# Altium PCB UVB LED Controller.PcbDoc
Units mm, origin at the board's own origin, x right, y up, seen from the top; angles counter-clockwise.
Board outline 80 x 155 mm, 2 copper layers (Top Layer, Bottom Layer), stack 1.569 mm thick; 142 components, 109 nets, 588 pads, 284 vias.
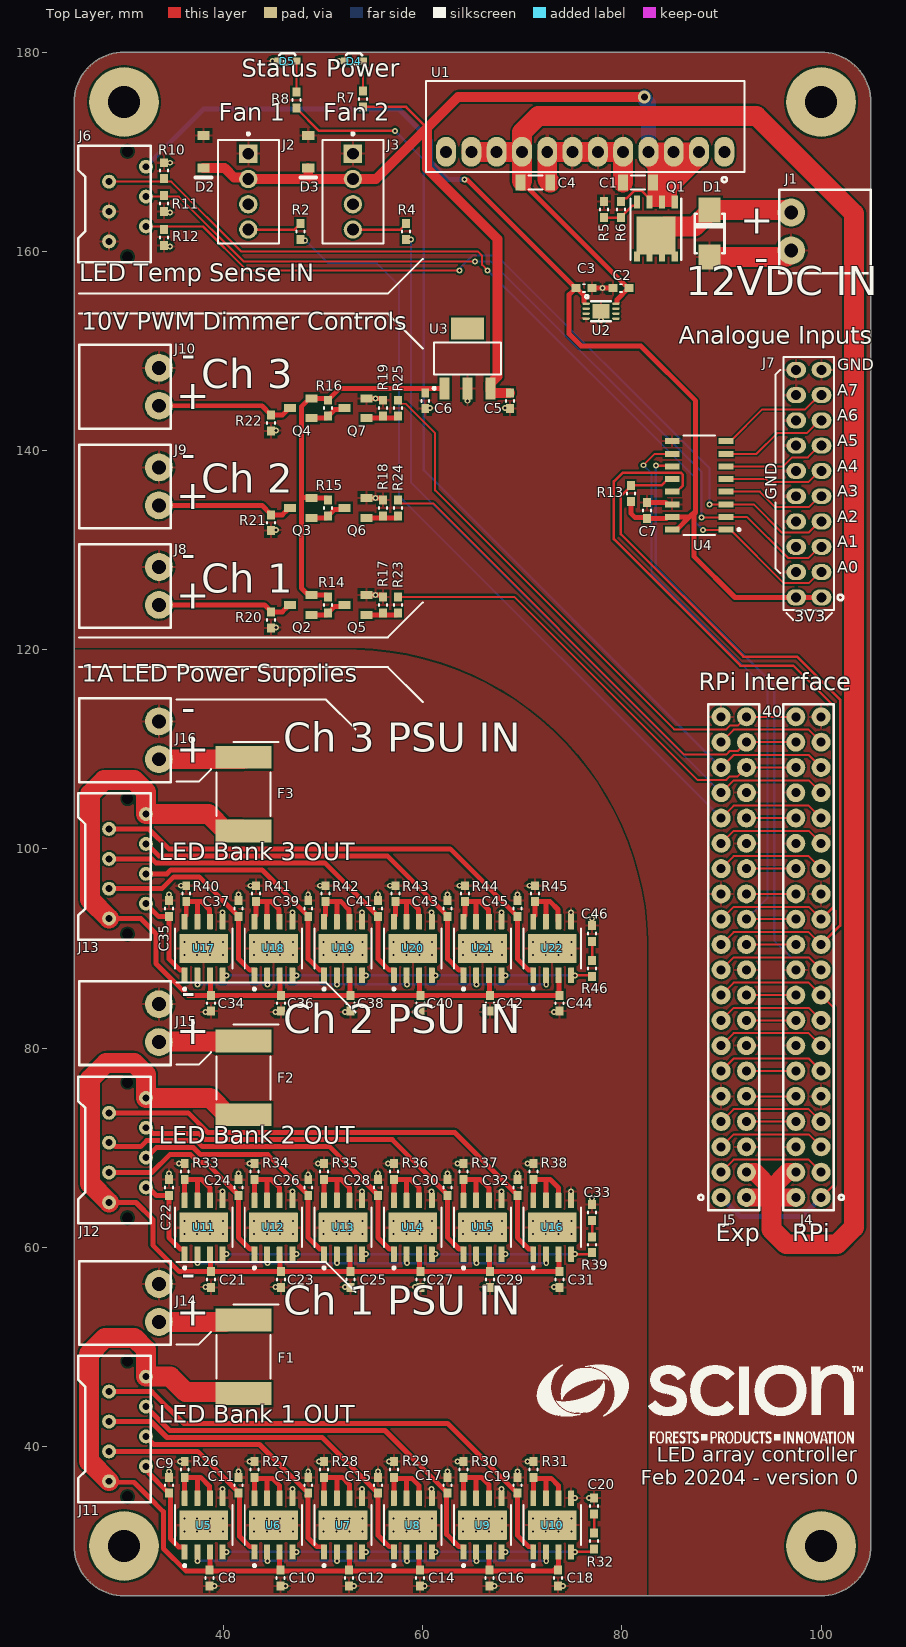
[diagram p0: Top Layer view]
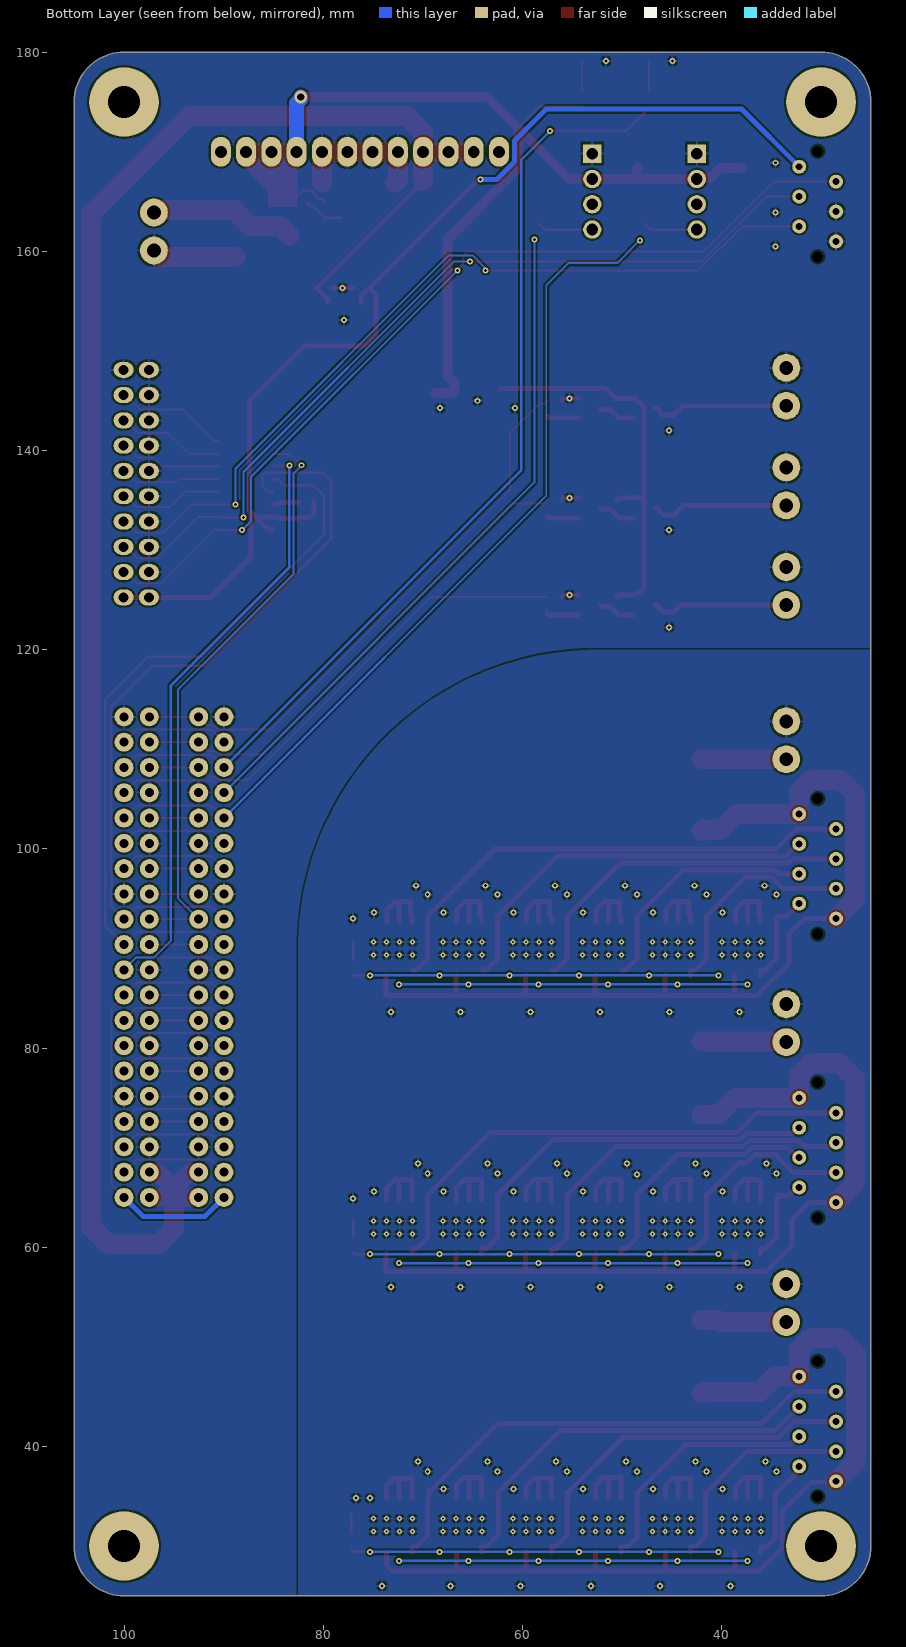
[diagram p1: Bottom Layer view, seen from below]
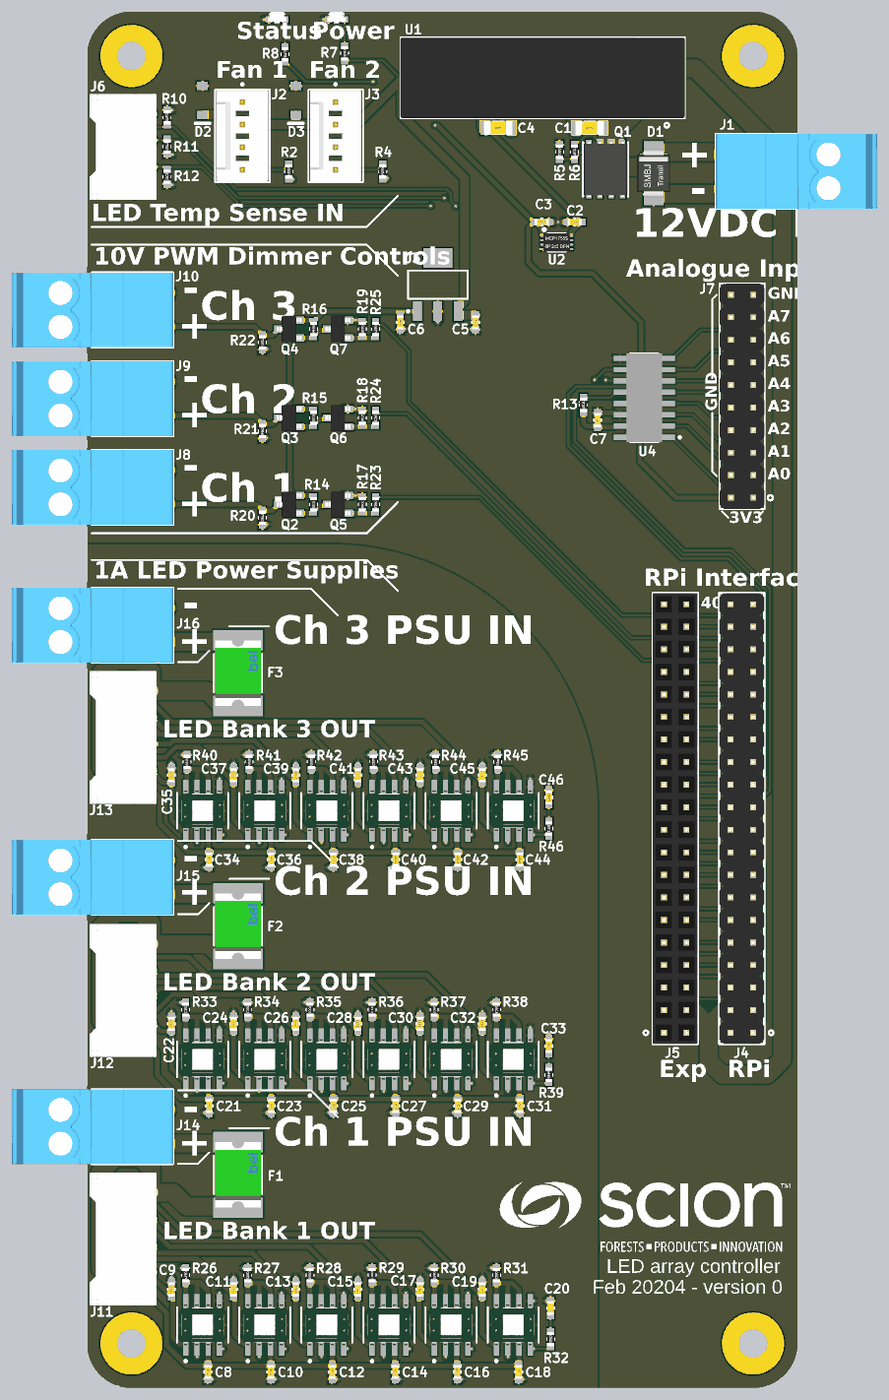
[diagram p2: 3D render of the assembled board from above, using the file's embedded part models]

## Layer stack, top to bottom
Top Solder: solder mask 0.0254, SM-001, Dk 4
Top Layer: signal copper 0.035
Dielectric 1: core 1.4986, Core-043, Dk 4.3
Bottom Layer: signal copper 0.035
Bottom Solder: solder mask 0.0254, SM-001, Dk 4

## Board outline
25,175 cw(c30,175) 30,180 100,180 cw(c100,175) 105,175 105,30 cw(c100,30) 100,25 30,25 cw(c30,30) 25,30

## Design rules (kind name [scope] priority, off if disabled: settings)
Clearance Clearance_1 [OnMid vs OnMid] p1: gap=0.2 ignorepadtopadclearanceinfootprint=FALSE sourcerule=38 cellrowname=All cellrowtype=0 cellcolname=All cellcoltype=0 innerlayers=TRUE
Clearance Clearance_2 [(ExistsOnLayer('Top Layer') Or ExistsOnLayer('Bottom Layer')) vs (ExistsOnLayer('Top Layer') Or ExistsOnLayer('Bottom Layer'))] p2: gap=0.2 ignorepadtopadclearanceinfootprint=FALSE sourcerule=38 cellrowname=All cellrowtype=0 cellcolname=All cellcoltype=0 outerlayers=TRUE
Clearance [All] p3: gap=0.254 ignorepadtopadclearanceinfootprint=FALSE ismatrix=TRUE
PolygonConnect [All] p1: connectstyle=Relief reliefconductorwidth=0.254 reliefentries=4 polygonreliefangle="90 Angle" airgapwidth=0.254
RoutingVias RoutingViaStyle_1 [All] p1: holewidth=0.3 width=0.6 viastyle="Through Hole" minholewidth=0.15 minwidth=0.4 maxholewidth=3 maxwidth=5
RoutingVias [All] p2: holewidth=0.711 width=1.27 viastyle="Through Hole" minholewidth=0.711 minwidth=1.27 maxholewidth=0.711 maxwidth=1.27
SolderMaskExpansion [All] p1: expansion=0.102 istentingtop=FALSE
Width MaxMinWidth_1 [All] p1: maxlimit=10 minlimit=0.2 preferedwidth=0.25 minimp=50.000000 maximp=50.000000 favimp=50.000000
Width [All] p2: maxlimit=0.254 minlimit=0.254 preferedwidth=0.254
30 further rules are at their usual default settings.

## Classes and differential pairs
component class "UVB LED Controller": C1 C2 C3 C4 C5 C6 C7 D1 D2 D3 D4 D5 J1 J2 J3 J4 J5 J6 J7 J8 J9 J10 Q1 Q2 Q3 Q4 Q5 Q6 Q7 R2 R4 R5 R6 R7 R8 R10 R11 R12 R13 R14 R15 R16 R17 R18 R19 R20 R21 R22 R23 R24 R25 U1 U2 U3 U4
component class "UVB LED Controller - current balancing": C8 C9 C10 C11 C12 C13 C14 C15 C16 C17 C18 C19 C20 C21 C22 C23 C24 C25 C26 C27 C28 C29 C30 C31 C32 C33 C34 C35 C36 C37 C38 C39 C40 C41 C42 C43 C44 C45 C46 F1 F2 F3 J11 J12 J13 J14 J15 J16 R26 R27 R28 R29 R30 R31 R32 R33 R34 R35 R36 R37 R38 R39 R40 R41 R42 R43 R44 R45 R46 U5 U6 U7 U8 U9 U10 U11 U12 U13 U14 U15 U16 U17 U18 U19 U20 U21 U22

## Components (designator, comment, footprint, x,y, rotation, side; value= is the part's Value field where it differs from the comment)
C1 "Capacitor" 1206_CAP 81.6,166.9 r180 top value=22µF
C2 "Capacitor" 0603_CAP 79.9,156.3 r180 top value=10µF
C3 "Capacitor" 0603_CAP 76.2,156.3 r0 top value=10µF
C4 "Capacitor" 1206_CAP 71.3,166.9 r180 top value=22µF
C5 "Capacitor" 0603_CAP 68.75,145 r270 top value=1µF
C6 "Capacitor" 0603_CAP 60.25,145 r270 top value=1µF
C7 "Capacitor" 0603_CAP 82.5,134 r90 top value=1µF
C8 "Capacitor" 0603_CAP 38.6,26.8 r270 top value=100nF
C9 "Capacitor" 0603_CAP 34.5,36.1 r90 top value=1µF
C10 "Capacitor" 0603_CAP 45.7,26.8 r270 top value=100nF
C11 "Capacitor" 0603_CAP 41.5,36.1 r90 top value=1µF
C12 "Capacitor" 0603_CAP 52.6,26.8 r270 top value=100nF
C13 "Capacitor" 0603_CAP 48.5,36.1 r90 top value=1µF
C14 "Capacitor" 0603_CAP 59.7,26.8 r270 top value=100nF
C15 "Capacitor" 0603_CAP 55.5,36.1 r90 top value=1µF
C16 "Capacitor" 0603_CAP 66.7,26.8 r270 top value=100nF
C17 "Capacitor" 0603_CAP 62.5,36.1 r90 top value=1µF
C18 "Capacitor" 0603_CAP 73.6,26.8 r270 top value=100nF
C19 "Capacitor" 0603_CAP 69.5,36.1 r90 top value=1µF
C20 "Capacitor" 0603_CAP 77.2,34 r270 top value=1µF
C21 "Capacitor" 0603_CAP 38.75,56.75 r270 top value=100nF
C22 "Capacitor" 0603_CAP 34.5,66 r90 top value=1µF
C23 "Capacitor" 0603_CAP 45.75,56.75 r270 top value=100nF
C24 "Capacitor" 0603_CAP 41.5,66 r90 top value=1µF
C25 "Capacitor" 0603_CAP 52.75,56.75 r270 top value=100nF
C26 "Capacitor" 0603_CAP 48.5,66 r90 top value=1µF
C27 "Capacitor" 0603_CAP 59.75,56.75 r270 top value=100nF
C28 "Capacitor" 0603_CAP 55.5,66 r90 top value=1µF
C29 "Capacitor" 0603_CAP 66.75,56.75 r270 top value=100nF
C30 "Capacitor" 0603_CAP 62.5,66 r90 top value=1µF
C31 "Capacitor" 0603_CAP 73.75,56.75 r270 top value=100nF
C32 "Capacitor" 0603_CAP 69.5,66 r90 top value=1µF
C33 "Capacitor" 0603_CAP 77,63.5 r270 top value=1µF
C34 "Capacitor" 0603_CAP 38.75,84.5 r270 top value=100nF
C35 "Capacitor" 0603_CAP 34.5,94 r90 top value=1µF
C36 "Capacitor" 0603_CAP 45.75,84.5 r270 top value=100nF
C37 "Capacitor" 0603_CAP 41.5,94 r90 top value=1µF
C38 "Capacitor" 0603_CAP 52.75,84.5 r270 top value=100nF
C39 "Capacitor" 0603_CAP 48.5,94 r90 top value=1µF
C40 "Capacitor" 0603_CAP 59.75,84.5 r270 top value=100nF
C41 "Capacitor" 0603_CAP 55.5,94 r90 top value=1µF
C42 "Capacitor" 0603_CAP 66.75,84.5 r270 top value=100nF
C43 "Capacitor" 0603_CAP 62.5,94 r90 top value=1µF
C44 "Capacitor" 0603_CAP 73.75,84.5 r270 top value=100nF
C45 "Capacitor" 0603_CAP 69.5,94 r90 top value=1µF
C46 "Capacitor" 0603_CAP 77,91.5 r270 top value=1µF
D1 "Transil" SMBJ 88.8,161.8 r90 top
D2 "Diode" SOD-123 38,170 r270 top
D3 "Diode" SOD-123 48.5,170 r270 top
D4 "LED" KPA-2106S_LED 53.1,179.1 r0 top
D5 "LED" KPA-2106S_LED 46.4,179.1 r0 top
F1 "0ZCF0100AF2A" FP-0ZCF0100AF2A-MFG 42,49 r90 top
F2 "0ZCF0100AF2A" FP-0ZCF0100AF2A-MFG 42,77 r90 top
F3 "0ZCF0100AF2A" FP-0ZCF0100AF2A-MFG 42,105.5 r90 top
J1 "2_Pin" "2P 3.81mm Header Plugable" 97,162 r270 top
J2 "22-29-2041" FP-22-29-2041-MFG 42.5,166 r90 top
J3 "22-29-2041" FP-22-29-2041-MFG 53,166 r90 top
J4 "40_Pin RPi Header" 40_Pin_0.1in_male_header 100,65 r180 top
J5 "40_Pin RPi Header" 40_Pin_0.1in_female_header 92.5,65 r180 top
J6 "Thermistors" "6P RA MOLEX Clik-MATE 1.5mm" 32.2,168.5 r270 top
J7 "20_Pin" "20P 2.54mm DIP header" 100.04,125.25 r180 top
J8 "LED dim 1" "2P 3.81mm Header Plugable" 33.5,126.405 r90 top
J9 "LED dim 2" "2P 3.81mm Header Plugable" 33.5,136.405 r90 top
J10 "LED dim 3" "2P 3.81mm Header Plugable" 33.5,146.405 r90 top
J11 "LED bank 1" "8P RA MOLEX Clik-MATE 1.5mm" 32.2,47 r270 top
J12 "LED bank 1" "8P RA MOLEX Clik-MATE 1.5mm" 32.2,75 r270 top
J13 "LED bank 1" "8P RA MOLEX Clik-MATE 1.5mm" 32.2,103.5 r270 top
J14 "LED supply 1" "2P 3.81mm Header Plugable" 33.5,54.405 r90 top
J15 "LED supply 2" "2P 3.81mm Header Plugable" 33.5,82.5 r90 top
J16 "LED supply 3" "2P 3.81mm Header Plugable" 33.5,110.905 r90 top
Q1 "PMOS" "PowerDI 5060-8" 83.4,162.222 r180 top
Q2 "PMOS" SOT-23-PMOS 47.75,124.5 r90 top
Q3 "PMOS" SOT-23-PMOS 47.75,134.25 r90 top
Q4 "PMOS" SOT-23-PMOS 47.75,144.25 r90 top
Q5 "NMOS" SOT-23 53.25,124.5 r90 top
Q6 "NMOS" SOT-23 53.25,134.25 r90 top
Q7 "NMOS" SOT-23 53.25,144.25 r90 top
R2 "Resistor" 0603_RES 47.7,162 r270 top value=100R
R4 "Resistor" 0603_RES 58.3,162 r270 top value=100R
R5 "Resistor" 0603_RES 78.2,164.2 r270 top value=10k
R6 "Resistor" 0603_RES 79.9,164.2 r90 top value=10k
R7 "Resistor" 0603_RES 54,175.3 r90 top value=1k
R8 "Resistor" 0603_RES 47.3,175.2 r90 top value=100R
R10 "Resistor" 0603_RES 34,168.1 r270 top value=10k
R11 "Resistor" 0603_RES 34,164.8 r90 top value=10k
R12 "Resistor" 0603_RES 34,161.4 r90 top value=10k
R13 "Resistor" 0603_RES 80.9,135.7 r90 top value=10k
R14 "Resistor" 0603_RES 50.5,124.5 r90 top value=100k
R15 "Resistor" 0603_RES 50.5,134.25 r90 top value=100k
R16 "Resistor" 0603_RES 50.5,144.25 r90 top value=100k
R17 "Resistor" 0603_RES 56,124.5 r90 top value=100k
R18 "Resistor" 0603_RES 56,134.25 r90 top value=100k
R19 "Resistor" 0603_RES 56,144.25 r90 top value=100k
R20 "Resistor" 0603_RES 44.75,123 r90 top value=10k
R21 "Resistor" 0603_RES 44.75,132.75 r90 top value=10k
R22 "Resistor" 0603_RES 44.75,142.75 r90 top value=10k
R23 "Resistor" 0603_RES 57.5,124.5 r270 top value=100R
R24 "Resistor" 0603_RES 57.5,134.25 r270 top value=100R
R25 "Resistor" 0603_RES 57.5,144.25 r270 top value=100R
R26 "Resistor" 0603_RES 36.1,37.7 r270 top value=2R
R27 "Resistor" 0603_RES 43.1,37.7 r270 top value=2R
R28 "Resistor" 0603_RES 50.1,37.7 r270 top value=2R
R29 "Resistor" 0603_RES 57.1,37.7 r270 top value=2R
R30 "Resistor" 0603_RES 64.1,37.7 r270 top value=2R
R31 "Resistor" 0603_RES 71.1,37.7 r270 top value=2R
R32 "Resistor" 0603_RES 77.2,30.5 r270 top value=51R1
R33 "Resistor" 0603_RES 36.1,67.6 r270 top value=2R
R34 "Resistor" 0603_RES 43.1,67.6 r270 top value=2R
R35 "Resistor" 0603_RES 50.1,67.6 r270 top value=2R
R36 "Resistor" 0603_RES 57.1,67.6 r270 top value=2R
R37 "Resistor" 0603_RES 64.1,67.6 r270 top value=2R
R38 "Resistor" 0603_RES 71.1,67.6 r270 top value=2R
R39 "Resistor" 0603_RES 77,60.25 r270 top value=51R1
R40 "Resistor" 0603_RES 36.25,95.5 r270 top value=2R
R41 "Resistor" 0603_RES 43.25,95.5 r270 top value=2R
R42 "Resistor" 0603_RES 50.25,95.5 r270 top value=2R
R43 "Resistor" 0603_RES 57.25,95.5 r270 top value=2R
R44 "Resistor" 0603_RES 64.25,95.5 r270 top value=2R
R45 "Resistor" 0603_RES 71.25,95.5 r270 top value=2R
R46 "Resistor" 0603_RES 77,88 r270 top value=51R1
U1 "K78XX-3AR3" K78XX-3AR3-Footprint 90.28,170 r180 top
U2 "MCP1755S" "8P 2x3 DFN" 77.9,154 r0 top
U3 "MCP1804T-A002I/DB" SOT-223-DB3_N 64.5,149.25 r90 top
U4 "MCP3008T-I/SL" FP-C04-108-MFG 87.75,136.5 r180 top
U5 "LM3466MR/NOPB" FP-DDA0008A-MFG 38,32.1 r90 top
U6 "LM3466MR/NOPB" FP-DDA0008A-MFG 45,32.1 r90 top
U7 "LM3466MR/NOPB" FP-DDA0008A-MFG 52,32.1 r90 top
U8 "LM3466MR/NOPB" FP-DDA0008A-MFG 59,32.1 r90 top
U9 "LM3466MR/NOPB" FP-DDA0008A-MFG 66,32.1 r90 top
U10 "LM3466MR/NOPB" FP-DDA0008A-MFG 73,32.1 r90 top
U11 "LM3466MR/NOPB" FP-DDA0008A-MFG 38,62 r90 top
U12 "LM3466MR/NOPB" FP-DDA0008A-MFG 45,62 r90 top
U13 "LM3466MR/NOPB" FP-DDA0008A-MFG 52,62 r90 top
U14 "LM3466MR/NOPB" FP-DDA0008A-MFG 59,62 r90 top
U15 "LM3466MR/NOPB" FP-DDA0008A-MFG 66,62 r90 top
U16 "LM3466MR/NOPB" FP-DDA0008A-MFG 73,62 r90 top
U17 "LM3466MR/NOPB" FP-DDA0008A-MFG 38,90 r90 top
U18 "LM3466MR/NOPB" FP-DDA0008A-MFG 45,90 r90 top
U19 "LM3466MR/NOPB" FP-DDA0008A-MFG 52,90 r90 top
U20 "LM3466MR/NOPB" FP-DDA0008A-MFG 59,90 r90 top
U21 "LM3466MR/NOPB" FP-DDA0008A-MFG 66,90 r90 top
U22 "LM3466MR/NOPB" FP-DDA0008A-MFG 73,90 r90 top

## Footprints (in the part's own frame and the unit in brackets; to place one, negate y for a bottom-side part, rotate by r counter-clockwise, add the part's x,y. Pads: shape width x height; smd on the part's side, far side on the other; paste and mask are expansions set on the pad)
"2P 3.81mm Header Plugable" [mm]
  round 2.8 hole 1.4 mask+0.05: 1(-1.905,0) 2(1.905,0)
  silkscreen extent -4.2,-1.2 4.2,8, body extent -4.21,-1.2 4.21,17, height 7.71
"6P RA MOLEX Clik-MATE 1.5mm" [mm] "5031750600"
  round 1.4 hole 0.7: 1(0,0) 2(1.5,-3.7) 3(3,0) 4(4.5,-3.7) 5(6,0) 6(7.5,-3.7)
  round 0 hole 1.1 unplated: ""(-1.55,-1.85) ""(9.05,-1.85)
  silkscreen extent -2.1,-6.8 9.6,0.5, body extent -2.2,-6.78 9.7,0.47, height 7
"8P 2x3 DFN" [mm]
  oval 0.75x0.25 smd: 1(-1.5,0.75) 2(-1.5,0.25) 3(-1.5,-0.25) 4(-1.5,-0.75) 5(1.5,-0.75) 6(1.5,-0.25) 7(1.5,0.25) 8(1.5,0.75)
  rect 1.75x1.45 smd: 9(0,0)
  silkscreen extent -1.58,-1 1,1.61, body extent -1.5,-1 1.5,1, height 0.91
"8P RA MOLEX Clik-MATE 1.5mm" [mm] "5031750800"
  round 1.4 hole 0.7: 1(0,0) 2(1.5,-3.7) 3(3,0) 4(4.5,-3.7) 5(6,0) 6(7.5,-3.7) 7(9,0) 8(10.5,-3.7)
  round 0 hole 1.1 unplated: ""(-1.55,-1.85) ""(12.05,-1.85)
  silkscreen extent -2.1,-6.8 12.6,0.5, body extent -2.2,-6.78 12.7,0.47, height 7
"20P 2.54mm DIP header" [mm]
  oval 2x1.6 hole 1: 1(0,0) 2(2.54,0) 3(0,-2.54) 4(2.54,-2.54) 5(0,-5.08) 6(2.54,-5.08) 7(0,-7.62) 8(2.54,-7.62) 9(0,-10.16) 10(2.54,-10.16) 11(0,-12.7) 12(2.54,-12.7) 13(0,-15.24) 14(2.54,-15.24) 15(0,-17.78) 16(2.54,-17.78) 17(0,-20.32) 18(2.54,-20.32) 19(0,-22.86) 20(2.54,-22.86)
  silkscreen extent -2.19,-24.13 3.81,1.27, body extent -1.27,-24.13 3.81,1.27, height 8.5
40_Pin_0.1in_female_header [mm]
  round 1.9 hole 0.9 mask+0.05: 1(2.54,0) 2(0,0) 3(2.54,-2.54) 4(0,-2.54) 5(2.54,-5.08) 6(0,-5.08) 7(2.54,-7.62) 8(0,-7.62) 9(2.54,-10.16) 10(0,-10.16) 11(2.54,-12.7) 12(0,-12.7) 13(2.54,-15.24) 14(0,-15.24) 15(2.54,-17.78) 16(0,-17.78) 17(2.54,-20.32) 18(0,-20.32) 19(2.54,-22.86) 20(0,-22.86) 21(2.54,-25.4) 22(0,-25.4) 23(2.54,-27.94) 24(0,-27.94) 25(2.54,-30.48) 26(0,-30.48) 27(2.54,-33.02) 28(0,-33.02) 29(2.54,-35.56) 30(0,-35.56) 31(2.54,-38.1) 32(0,-38.1) 33(2.54,-40.64) 34(0,-40.64) 35(2.54,-43.18) 36(0,-43.18) 37(2.54,-45.72) 38(0,-45.72) 39(2.54,-48.26) 40(0,-48.26)
  silkscreen extent -1.27,-49.53 4.83,1.27, body extent -1.27,-49.53 3.81,1.27, height 8.4
40_Pin_0.1in_male_header [mm]
  round 1.9 hole 0.9 mask+0.05: 1(0,0) 2(2.54,0) 3(0,-2.54) 4(2.54,-2.54) 5(0,-5.08) 6(2.54,-5.08) 7(0,-7.62) 8(2.54,-7.62) 9(0,-10.16) 10(2.54,-10.16) 11(0,-12.7) 12(2.54,-12.7) 13(0,-15.24) 14(2.54,-15.24) 15(0,-17.78) 16(2.54,-17.78) 17(0,-20.32) 18(2.54,-20.32) 19(0,-22.86) 20(2.54,-22.86) 21(0,-25.4) 22(2.54,-25.4) 23(0,-27.94) 24(2.54,-27.94) 25(0,-30.48) 26(2.54,-30.48) 27(0,-33.02) 28(2.54,-33.02) 29(0,-35.56) 30(2.54,-35.56) 31(0,-38.1) 32(2.54,-38.1) 33(0,-40.64) 34(2.54,-40.64) 35(0,-43.18) 36(2.54,-43.18) 37(0,-45.72) 38(2.54,-45.72) 39(0,-48.26) 40(2.54,-48.26)
  silkscreen extent -2.29,-49.53 3.81,1.27, body extent -1.27,-49.53 3.81,1.27, height 8.5
0603_CAP [mm] "SMD Capacitor 0603"
  rect 0.9x0.8 smd: 1(-0.8,0) 2(0.8,0)
  silkscreen extent -0.1,-0.4 0.1,0.4, body extent -0.8,-0.4 0.8,0.4, height 0.8
0603_RES [mm] "SMD Resistor 0603"
  rect 0.9x0.8 smd: 1(-0.8,0) 2(0.8,0)
  silkscreen extent -0.1,-0.4 0.1,0.4, body extent -0.8,-0.4 0.8,0.4, height 0.45
1206_CAP [mm] "SMD Capacitor 1206"
  rect 1x1.6 smd: 1(-1.5,0) 2(1.5,0)
  silkscreen extent -0.7,-0.7 0.7,0.7, body extent -1.6,-0.8 1.6,0.8, height 1.6
FP-0ZCF0100AF2A-MFG [mm]
  rect 2.3x5.6 smd paste+0 mask+0: 1(-3.7,0) 2(3.7,0)
  silkscreen extent -2.17,-2.72 2.17,2.72, body extent -4.95,-2.9 4.95,2.9, height 0.25
FP-22-29-2041-MFG [mm]
  rect 1.84x1.84 hole 1.19 paste-2539.97 mask+0: 1(3.81,0.02)
  round 1.84 hole 1.19 paste-2539.97 mask+0: 2(1.27,0.02) 3(-1.27,0.02) 4(-3.81,0.02)
  silkscreen extent -5.21,-3.08 5.93,3.08, body extent -5.31,-3.18 5.31,3.18, height 0.25
FP-C04-108-MFG [mm]
  rect 1.5x0.6 smd paste+0 mask+0: 1(-2.7,4.445) 2(-2.7,3.175) 3(-2.7,1.905) 4(-2.7,0.635) 5(-2.7,-0.635) 6(-2.7,-1.905) 7(-2.7,-3.175) 8(-2.7,-4.445) 9(2.7,-4.445) 10(2.7,-3.175) 11(2.7,-1.905) 12(2.7,-0.635) 13(2.7,0.635) 14(2.7,1.905) 15(2.7,3.175) 16(2.7,4.445)
  silkscreen extent -4.12,-5 1.58,5, body extent -3.55,-5.25 3.55,5.25, height 0.25
FP-DDA0008A-MFG [mm]
  rrect17% 1.55x0.6 smd paste+0 mask+0: 1(-2.7,1.905) 2(-2.7,0.635) 3(-2.7,-0.635) 4(-2.7,-1.905) 5(2.7,-1.905) 6(2.7,-0.635) 7(2.7,0.635) 8(2.7,1.905)
  rrect3% 2.95x4.9 smd paste-1000 mask-1000: 9(0,0)
  silkscreen extent -4.2,-2.88 2,2.88, body extent -3.57,-2.75 3.57,2.75, height 0.25
K78XX-3AR3-Footprint [mm]
  oval 2x3 hole 1.2: 1(0,0) 2(2.54,0) 3(5.08,0) 4(7.62,0) 5(10.16,0) 6(12.7,0) 7(15.24,0) 8(17.78,0) 9(20.32,0) 10(22.86,0) 11(25.4,0) 12(27.94,0)
  silkscreen extent -2.03,-7.11 29.97,3.05, body extent -2.11,-7.07 30.04,1.98, height 14.85
KPA-2106S_LED [mm] "SMD RA LED"
  rect 0.8x0.7 smd: 1(-0.9,0) 2(0.9,0)
  silkscreen extent -0.8,-0.3 0.8,0.8, body extent -1.05,-0.25 1.05,0.75, height 0.6
"PowerDI 5060-8" [mm] "Power MOSFET"
  rect 0.61x1.02 smd: D(-1.905,2.731) D(-0.635,2.73) D(0.635,2.73) D(1.905,2.731)
  rect 3.91x3.81 smd: D(0,0.622)
  rect 0.61x1.27 smd: G(1.905,-2.73) S(-1.905,-2.731) S(-0.635,-2.73) S(0.635,-2.73)
  silkscreen extent -2.54,-3.05 2.54,3.05, body extent -2.57,-3.08 2.58,3.07, height 0.96
SMBJ [mm] "Transil"
  rect 2.5x2.2 smd: 1(-2.35,0) 2(2.35,0)
  silkscreen extent -2,-1.5 2,1.5, body extent -2.7,-1.85 2.7,1.85, height 2.2
SOD-123 [mil] "SOD123, 2-Leads, Body 2.7x1.6mm, Height 1.35mm"
  rect 35.98x47.99 smd: 1(64.5,0) 2(-64.5,0)
  silkscreen extent 102,-31 102,31, body extent -53,-31 53,31, height 53
SOT-23 [mm]
  rect 0.8x1.2 smd: 1(-1,-1.1) 2(0,1.1) 3(1,-1.1)
  body extent -1.5,-1.42 1.5,1.42, height 1.2
SOT-23-PMOS [mm]
  rect 0.8x1.2 smd: 1(-1,-1.1) 2(1,-1.1) 3(0,1.1)
  body extent -1.5,-1.42 1.5,1.42, height 1.2
SOT-223-DB3_N [mm] "SOT223, 4-Leads, Body 6.5x3.5mm, Pitch 2.3mm, Lead Span 7mm, IPC Medium Density"
  rect 2.2x1 smd: 1(-3,2.3) 2(-3,0) 3(-3,-2.3)
  rect 2.2x3.3 smd: 4(3,0)
  silkscreen extent -3.12,-3.35 1.6,3.47, body extent -1.85,-3.35 1.85,3.35, height 1.8

## Part data
C1 C2 C3 C4 C5 C6 C7 C8 C9 C10 C11 C12 C13 C14 C15 C16 C17 C18 C19 C20 C21 C22 C23 C24 C25 C26 C27 C28 C29 C30 C31 C32 C33 C34 C35 C36 C37 C38 C39 C40 C41 C42 C43 C44 C45 C46: library part CMP-001-00172-2, "SMD Capacitor", Component Type=Standard, Design Item ID=Capacitor, Pins=2, Source=Discrete.SchLib
D1: library part CMP-079-000108-2, "Transient Voltage Suppressor", Rated Voltage=15V, Component Type=Standard, Design Item ID=Transil, MFN=SMBJ33A, Pin Count=2, Source=Discrete.SchLib
D2 D3: library part CMP-004-00083-4, "SMD Diode", Component Type=Standard, Design Item ID=Diode, Pin Count=2, Pins=2, Source=Discrete.SchLib
D4 D5: library part CMP-004-00084-2, "SMD LED", Colour=RED, Component Type=Standard, Design Item ID=LED, Pin Count=2, Pins=2, Source=Discrete.SchLib
F1 F2 F3: library part CMP-005-00014-2, "PTC Resettable Fuse 100A 0.5s 60VDC 0.09 Ohm 2-Pin 2920 T/R", Case Code (Metric)=7351, Case/Package=2920, Hold Current=1A, Max Current Rating=100A, Max Operating Temperature=85°C, Min Operating Temperature=-40°C, Trip Current=2A, Component Type=Standard, Design Item ID=CMP-00051-1, Length=0.29inch, Mount="Surface Mount", Packaging="Cut Tape", Pins=2, RoHS Compliant=Yes, Series=0ZCF, Source="All Components - 30.06.23 - 18.27.SchLib", Thickness=0.067inch, Time to Trip=500ms, Width=0.202inch
J1 J8 J9 J10 J14 J15 J16: library part CMP-002-00173-1, "2 Pin Connector", Component Type=Standard, Design Item ID=2_Pin, Pin Count=2, Pins=2, Source=Connectors.SchLib
J2 J3: library part CMP-04776-000366-1, "CONN HEADER VERT 4POS 2.54MM", Color=Natural, Contact Resistance=10mR, Current Rating=4A, Flammability Rating="UL94 V-0", Housing Color=White, Insulation Resistance=50GR, Max Operating Temperature=75°C, Min Operating Temperature=0°C, Package Quantity=1500, Voltage Rating=250V, Contact Gender=Male, Contact Material=Brass, Contact Mating Length=0.295inch, Contact Plating=Gold, Contact Type="Male Pin", Depth=5.8mm, Fastening Type=Friction, Gender=Male, Glow Wire Compliant=Non-compliant, Halogen Free="Low Halogen", Height=11.7mm, Housing Material=Nylon, Lead Free="Lead Free", Length=10.16mm, Max Current Rating=4A, Mount="Through Hole", Number of Circuits=4, Number of Contacts=4, Number of Lines=1, Number of Poles=4, Number of Positions=4, Number of Rows=1, Orientation=Straight, Packaging=Bulk, Pitch=2.54mm, Radiation Hardening=No, RoHS Compliant=Yes, Series="KK® 6410", Termination=Solder, Voltage Rating (DC)=250V
J4 J5: library part CMP-002-00133-3, "40 pin header for Raspberry Pi compatible connections", Component Type=Standard, Design Item ID=CMP-00031-2, Pin Count=40, Source="All Components - 30.06.23 - 18.27.SchLib"
J6: library part CMP-002-00180-3, "6 Pin Connector", Component Type=Standard, Design Item ID=6_Pin, Pin Count=6, Pins=6, Source=Connectors.SchLib
J7: library part CMP-002-00001-3, "20 pin connector"
J11 J12 J13: library part CMP-002-00183-2, "8 Pin Connector", Component Type=Standard, Design Item ID=8_Pin, Pin Count=8, Pins=8, Source=Connectors.SchLib
Q1: library part CMP-079-000102-2, "P Channel MOSFET", Component Type=Standard, Design Item ID="PMOS GDS", Pin Count=3, Source=P-MOS.SchLib
Q2 Q3 Q4: library part CMP-079-000100-1, "P Channel MOSFET", Component Type=Standard, Design Item ID=PMOS, MFN=BSS308PE, Pin Count=3, Source=P-MOS.SchLib
Q5 Q6 Q7: library part CMP-079-000093-2, "N Channel MOSFET", Component Type=Standard, Design Item ID=NMOS, Pin Count=3, Source=N-MOS.SchLib
R2 R4 R5 R6 R7 R8 R10 R11 R12 R13 R14 R15 R16 R17 R18 R19 R20 R21 R22 R23 R24 R25: library part CMP-009-00356-1, "SMD Resistor", Component Type=Standard, Design Item ID=Resistor, Pins=2, Source=Discrete.SchLib
R26 R27 R28 R29 R30 R31 R32 R33 R34 R35 R36 R37 R38 R39 R40 R41 R42 R43 R44 R45 R46: library part CMP-009-00356-3, "SMD Resistor", Component Type=Standard, Design Item ID=Resistor, Pins=2, Source=Discrete.SchLib
U1: library part CMP-015-000000-2, "Mornsun DC-DC power module 3A, 0-36Vin, 3.3-15V out"
U2: library part CMP-079-000090-2, "LDO Linear Voltage Regulator", Component Type=Standard, Design Item ID=MCP1755S, Pin Count=9, Source=Microchip.SchLib
U3: library part CMP-0136-00501-1, "150 mA, 28V LDO Regulator With Shutdown, 3-Pin SOT-223, Industrial Temperature, Tape and Reel", DatasheetVersion="revB, Nov-2009", PackageDescription="3-Lead Plastic Small Outline Transistor (DB) [SOT-223]", PackageReference=SOT-223-DB3, PackageVersion="revBB, Aug-2009"
U4: library part CMP-0188-00351-3, "IC ADC 10BIT SAR 16SOIC", Case/Package=SOIC, Max Operating Temperature=85°C, Max Supply Voltage=5.5V, Min Operating Temperature=-40°C, Min Supply Voltage=2.7V, Nominal Supply Current=425uA, Operating Supply Voltage=5V, Output Voltage=4.1V, Package Quantity=2600, Contact Plating=Tin, Conversion Rate=200KS/s, Differential Nonlinearity=1LSB, Full Scale Error=1LSB, Integral Nonlinearity (INL)=1LSB, Interface=SPI, Lead Free="Lead Free", Mount="Surface Mount", Number of A/D Converters=1, Number of Bits=10, Number of Channels=8, Number of Converters=1, Number of Elements=1, Number of Pins=16, Packaging="Tape and Reel", Polarity=Unipolar, Radiation Hardening=No, REACH SVHC="No SVHC", Resolution=10b, Sampling Rate=200KS/s, Signal to Noise Ratio (SNR)=200dB, Supply Type=Single
U5 U6 U7 U8 U9 U10 U11 U12 U13 U14 U15 U16 U17 U18 U19 U20 U21 U22: library part CMP-04914-000005-1, "IC LED DRIVER LIN 1.5A 8SOPWRPAD", Manufacturer="Texas Instruments", Max Junction Temp=+125°C, Max Supply Voltage=70V, Min Supply Voltage=6V, Nominal Supply Current=550uA, Output Current=1.5A, Package=DDA0008A, Temperature="-40°C to +125°C", Temperature Range Low=-40°C, Automotive=No, Category=IC, ComponentLink2Description=Datasheet, ComponentLink2URL=http://www.ti.com/lit/ds/symlink/lm3466.pdf, Device Class L1="Integrated Circuits (ICs)", Device Class L2="Power Management ICs", Device Class L3="LED Drivers", Digikey Description="IC LED DRIVER LIN 1.5A 8SOPWRPAD", Dimming=Analog, Height=1.7mm, Ipc Land Pattern Name=SOIC127P600X170-8, Lead Free=Yes, Manufacturer Part Number=LM3466MR/NOPB, Mouser Description="Multi-String LED Current Balancer for Use with Constant Current Power Supplies 8-SO PowerPAD -40 to 125", Number of Outputs=1, Octopart=https://octopart.com/lm3466mr%2Fnopb-texas+instruments-24813886, Output Voltage=70V, RoHS=TRUE, Standoff Height=0mm, Temperature Range High=+125°C

## Free pads (board coordinates)
  round 7 hole 3.2: ""(30,30) ""(30,175) ""(100,30) ""(100,175)

## Via types
v1: diameter 0.5, hole 0.2, Top Layer to Bottom Layer, 144 vias
v2: diameter 0.6, hole 0.3, Top Layer to Bottom Layer, tented both sides, 139 vias
v3: diameter 1.27, hole 0.711, Top Layer to Bottom Layer, tented both sides, 1 vias

## Nets (pads, with @x,y where several pads share a name; then routed paths per layer and width w, separated by ;. In a path a pad name is that pad's centre, name@x,y a point inside that pad or via, vN(x,y) a via of type N, cw(c..) or ccw(c..) an arc to the next point about the centre after c; other vN are vias at no path point)
+3V3: C3.1 C7.1 J6.1 J7.1 J7.2 R13.1 U2.1 U4.15 U4.16 | length 117.1
  Top Layer w0.5: v2(64.2,167.2) 64.219,167.181 64.469,167.181 C3.1@75.35,156.3 ; 76.2,154.9 76.2,155.55 75.45,156.3 C3.1 C3.1@75.35,156.3 ; R13.1 80.9,133.7 81.3,133.3 82.4,133.3 C7.1 84.475,133.2 84.6,133.325 U4.15 86.77,133.325 ; U4.16 85.5,132.055 85.55,132.105 86.77,133.325 ; J7.1 J7.2 91.35,125.25 87.25,129.35 87.25,133.611 87.4,133.761 87.4,133.955 ; C3.1@75.35,156.3 74.7,155.65 74.7,151.7 75.9,150.5 81.9,150.5 87.4,145 87.4,133.955 ; 86.77,133.325 87.4,133.955
  Bottom Layer w0.5: J6.1 38,174.3 57.6,174.3 60.785,171.115 60.785,169.004 62.589,167.2 v2(64.2,167.2)
+3V3_Pi: J4.1 J4.17 J5.1 J5.17 | length 44
  Top Layer w0.2: J5.17 91.21,86.57 98.75,86.57 J4.17 101.25,84.07 101.25,66.25 J4.1
  Bottom Layer w0.5: J5.1 91.86,63.1 98.1,63.1 J4.1
+5V: C2.1 C4.2 J4.2 J4.4 J5.2 J5.4 U1.9 U1.10 U1.11 U2.8 | length 192.4
  Top Layer w0.5: C4.2 69.8,166.6 70.05,166.35 70.6,166.35 C2.1@80.65,156.3 ; 79.5,154.9 79.5,155.15 C2.1@80.65,156.3 ; C2.1 C2.1@80.65,156.3
  Top Layer w1.8: J5.2 94.8,65 ; J5.4 93.36,67.54 95,65.9 96.64,67.54 J4.4 ; 95.2,65 J4.2
  Top Layer w2: U1.11 U1.10 U1.9 ; C4.2@69.96,167.06 U1.9 ; 94.8,65 95,64.8 ; 95,65.9 95,64.8 ; 95.2,65 95,64.8 ; U1.9 69.96,171.96 71.6,173.6 93.5,173.6 103.3,163.8 103.3,62 101.6,60.3 96.5,60.3 95,61.8 95,64.8
+10V: C6.1 Q2.2 Q3.2 Q4.2 R14.2 R15.2 R16.2 U3.1 | length 39.3
  Top Layer w0.5: R14.2 50.5,125.35 50.35,125.5 Q2.2 48.7,125.65 48.35,125.65 47.8,126.2 47.8,135.3 ; R15.2 50.5,135.1 50.35,135.25 Q3.2 48.8,135.3 47.8,135.3 ; U3.1 51.65,146.25 50.65,145.25 Q4.2 48.65,145.25 47.8,144.4 47.8,135.3
+12V: C1.1 C5.1 D2.1 D3.1 J2.2 J3.2 Q1.S R6.2 R7.1 U1.2 U1.3 U1.4 U3.3 | length 97.9
  Top Layer w0.25: R7.1 58.326,174.5 60.431,172.395 ; R6.2 79.9,165.044 80.175,165.319 80.461,165.319 81.243,166.1 81.948,166.1 82.765,165.283 Q1.S@82.765,164.953
  Top Layer w1: D2.1 40.11,168.362 41.04,167.431 42.319,167.431 J2.2 48.5,167.27 ; D3.1 48.5,167.27 ; C5.1 67.05,145.8 66.8,146.05 66.8,146.85 66.914,146.85 67.5,147.436 67.5,161.25 60.431,168.319 60.431,172.395 ; v3(82.25,175.5) 63.536,175.5 60.431,172.395 ; 48.5,167.27 J3.2 55.306,167.27 60.431,172.395
  Bottom Layer w1.5: v3(82.25,175.5) 82.25,175.292 82.66,174.882 U1.4
+CC1: C8.1 C10.1 C12.1 C14.1 C16.1 C18.1 F1.1 J11.1 J11.8 U5.3 U6.3 U7.3 U8.3 U9.3 U10.3 | length 95.9
  Top Layer w0.5: J11.8 28.6,36.4 31,36.4 32.475,34.925 33.95,33.45 33.95,29.75 36.2,27.5 C8.1@38.7,27.5 ; U5.3 38.635,27.565 C8.1@38.7,27.5 ; U6.3 45.635,27.535 C10.1@45.6,27.5 ; U7.3 52.635,27.535 C12.1@52.6,27.5 ; U8.3 59.635,27.535 C14.1@59.6,27.5 ; U9.3 66.635,27.565 C16.1@66.7,27.5 ; U10.3 73.635,28.035 73.425,27.825 73.1,27.5 68.1,27.5 C16.1@66.7,27.5 ; C8.1@38.7,27.5 C10.1@45.6,27.5 ; C10.1@45.6,27.5 C12.1@52.6,27.5 ; C12.1@52.6,27.5 C14.1@59.6,27.5 ; C14.1@59.6,27.5 C16.1@66.7,27.5
  Top Layer w2: J11.8 26.5,38.5 26.5,49.3 28.1,50.9 31.028,50.9 32.2,49.728 J11.1 34.65,47 36.2,45.45 41.85,45.45 F1.1
+CC2: C21.1 C23.1 C25.1 C27.1 C29.1 C31.1 F2.1 J12.1 J12.8 U11.3 U12.3 U13.3 U14.3 U15.3 U16.3 | length 93.2
  Top Layer w0.5: J12.8 31.2,64.5 32.9,62.8 32.9,60.2 35.55,57.55 C21.1 ; U11.3 38.685,59.25 38.685,57.615 C21.1 ; U12.3 45.685,59.25 45.685,57.615 C23.1 ; U13.3 52.685,59.25 52.685,57.615 C25.1 ; U14.3 59.685,59.25 59.685,57.615 C27.1 ; U15.3 66.685,59.25 66.685,57.615 C29.1 ; U16.3 73.685,59.25 73.685,57.615 C31.1 C29.1 ; C21.1 C23.1 ; C23.1 C25.1 ; C25.1 C27.1 ; C27.1 C29.1
  Top Layer w2: J12.8 26.6,66.4 26.6,76.9 28.2,78.5 31.028,78.5 32.2,77.328 J12.1 38.65,75 40.35,73.3 F2.1
+CC3: C34.1 C36.1 C38.1 C40.1 C42.1 C44.1 F3.1 J13.1 J13.8 U17.3 U18.3 U19.3 U20.3 U21.3 U22.3 | length 95.2
  Top Layer w0.5: J13.8 31.7,93 33.2,91.5 33.2,88.5 36.4,85.3 C34.1 ; U17.3 38.685,87.25 38.685,85.365 C34.1 ; U18.3 45.685,87.25 45.685,85.365 C36.1 ; U19.3 52.685,87.25 52.685,85.365 C38.1 ; U20.3 59.685,87.25 59.685,85.365 C40.1 ; U21.3 66.685,87.25 66.685,85.365 C42.1 ; U22.3 73.685,87.25 73.685,85.365 C44.1 C42.1 ; C34.1 C36.1 ; C36.1 C38.1 ; C38.1 C40.1 ; C40.1 C42.1
  Top Layer w2: J13.8 26.6,94.9 26.6,105.5 28,106.9 31.028,106.9 32.2,105.728 J13.1 38.5,103.5 40.05,101.95 41.85,101.95 F3.1
+VIN: D1.2 J1.1 Q1.D | length 14.9
  Top Layer w2: Q1.D@83.4,161.6 84.305,162.505 87.305,162.505 88.8,164 D1.2 96.755,164.15 cw(c96.755,163.905) J1.1
A0: J6.2 J7.3 R10.2 U4.1 | length 91.9
  Top Layer w0.2: J6.2 34.75,167 41.75,160 65.5,160 65.962,159.538 65.962,158.638 v2(66.5,158.1) ; v2(88.15,132) 90.395,132 U4.1 90.9,132.055 96.265,126.69 98.74,126.69 99.84,127.79 J7.3
  Bottom Layer w0.2: v2(66.5,158.1) 87.25,137.35 87.25,132.9 v2(88.15,132)
A1: J6.3 J7.5 R11.2 U4.2 | length 86
  Top Layer w0.2: J6.3 35.5,165.5 42,159 v2(65.25,159) ; v2(88,133.3) 90.425,133.3 U4.2 92.58,133.325 96.675,129.23 98.74,129.23 99.84,130.33 J7.5
  Bottom Layer w0.2: v2(65.25,159) 66.849,159 88,137.849 v2(88,133.3)
A2: J6.5 J7.7 R12.2 U4.3 | length 84.5
  Top Layer w0.2: J6.5 37.934,162.5 42.334,158.1 v2(63.7,158.1) ; v2(88.8,134.6) 90.445,134.6 U4.3 93.215,134.595 96.04,131.77 98.74,131.77 99.84,132.87 J7.7
  Bottom Layer w0.2: v2(63.7,158.1) 63.777,158.177 63.777,158.375 65.001,159.6 67.4,159.6 88.8,138.2 v2(88.8,134.6)
A3: J7.9 U4.4 | length 10.7
  Top Layer w0.2: U4.4 93.85,135.865 95.405,134.31 98.74,134.31 99.84,135.41 J7.9
A4: J7.11 U4.5 | length 10.2
  Top Layer w0.2: U4.5 94.485,137.135 94.77,136.85 98.74,136.85 99.84,137.95 J7.11
A5: J7.13 U4.6 | length 10.5
  Top Layer w0.2: U4.6 96.199,138.405 97.108,139.314 98.664,139.314 99.84,140.49 J7.13
A6: J7.15 U4.7 | length 11
  Top Layer w0.2: U4.7 93.513,139.675 95.588,141.75 98.56,141.75 99.84,143.03 J7.15
A7: J7.17 U4.8 | length 11.5
  Top Layer w0.2: U4.8 90.9,140.945 94.085,144.13 98.4,144.13 99.84,145.57 J7.17
GND: C1.2 C2.2 C3.2 C4.1 C5.2 C6.2 C7.2 D1.1 D2.2 D3.2 D4.1 D5.1 J1.2 J2.1 J3.1 J4.6 J4.9 J4.14 J4.20 J4.25 J4.30 J4.34 J4.39 J5.6 J5.9 J5.14 J5.20 J5.25 J5.30 J5.34 J5.39 J6.4 J6.6 J7.4 J7.6 J7.8 J7.10 J7.12 J7.14 J7.16 J7.18 J7.19 J7.20 J8.2 J9.2 J10.2 Q5.3 Q6.3 Q7.3 R5.1 R10.1 R11.1 R12.1 R17.2 R18.2 R19.2 R20.1 R21.1 R22.1 U1.5 U1.6 U1.7 U1.8 U2.4 U2.9 U3.2 U4.9 U4.14 | length 32.5
  Top Layer w0.5: Q5.3 55.85,125.5 56,125.35 R17.2 ; Q6.3 55.85,135.25 56,135.1 R18.2 ; Q7.3 55.85,145.25 56,145.1 R19.2 ; C3.2 C2.2 ; C7.2 84.395,134.8 84.6,134.595 U4.14
  Top Layer w2: C4.1 72.5,167.2 U1.8 U1.7 U1.6 U1.5 80.12,166.92 C1.2 ; D1.1 96.355,159.45 ccw(c96.355,160.095) J1.2
  other v2: 45.25,122.25 55.25,125.5 45.25,132 55.25,135.25 45.25,142 60.75,144.25 68.25,144.25 64.5,145 55.25,145.25 77.9,153.1 78.05,156.3 34.6,160.5 34.6,163.9 34.6,168.9 44.9,179.1 51.6,179.1
GPIO_0: J4.27 J5.27 | length 11.1
  Top Layer w0.2: J5.27 91.21,99.27 98.75,99.27 J4.27
GPIO_1: J4.28 J5.28 | length 5
  Top Layer w0.2: J5.28 J4.28
GPIO_2: J4.3 J5.3 | length 11.1
  Top Layer w0.2: J5.3 91.21,68.79 98.75,68.79 J4.3
GPIO_3: J4.5 J5.5 | length 11.1
  Top Layer w0.2: J5.5 91.21,71.33 98.75,71.33 J4.5
GPIO_4: J4.7 J5.7 | length 11.1
  Top Layer w0.2: J5.7 91.21,73.87 98.75,73.87 J4.7
GPIO_5: J4.29 J5.29 | length 11.1
  Top Layer w0.2: J5.29 91.21,101.81 98.75,101.81 J4.29
GPIO_6: J4.31 J5.31 R2.2 | length 89.2
  Top Layer w0.2: J5.31 91.21,104.35 98.75,104.35 J4.31
  Bottom Layer w0.2: v2(48.2,161.1) 50.488,158.812 55.388,158.812 57.6,156.6 57.6,135.46 J5.31
GPIO_7: J4.26 J5.26 | length 5
  Top Layer w0.2: J5.26 J4.26
GPIO_12: J4.32 J5.32 | length 5
  Top Layer w0.2: J5.32 J4.32
GPIO_13: J4.33 J5.33 R4.2 | length 79.5
  Top Layer w0.2: J5.33 91.21,106.89 98.75,106.89 J4.33
  Bottom Layer w0.2: v2(58.8,161.2) 58.8,136.8 J5.33
GPIO_14: J4.8 J5.8 | length 5
  Top Layer w0.2: J5.8 J4.8
GPIO_15: J4.10 J5.10 | length 5
  Top Layer w0.2: J5.10 J4.10
GPIO_16: J4.36 J5.36 R23.1 | length 48.1
  Top Layer w0.2: R23.1 69.2,125.3 87.57,106.93 90.478,106.93 90.838,107.29 91.61,107.29 J5.36 J4.36
GPIO_17: J4.11 J5.11 | length 11.1
  Top Layer w0.2: J5.11 91.21,78.95 98.75,78.95 J4.11
GPIO_18: J4.12 J5.12 | length 5
  Top Layer w0.2: J5.12 J4.12
GPIO_19: J4.35 J5.35 R8.1 | length 99.4
  Top Layer w0.2: J5.35 91.21,109.43 98.75,109.43 J4.35
  Top Layer w0.25: R8.1 49.6,172.1 v2(57.2,172.1)
  Bottom Layer w0.25: v2(57.2,172.1) 60.1,169.2 60.1,138.04 J5.35
GPIO_20: J4.38 J5.38 R24.1 | length 51.1
  Top Layer w0.2: R24.1 57.5,135 57.8,134.7 61.05,134.7 86.28,109.47 90.478,109.47 90.838,109.83 91.61,109.83 J5.38 J4.38
GPIO_21: J4.40 J5.40 R25.1 | length 57.6
  Top Layer w0.2: R25.1 57.5,145 57.8,144.7 58.3,144.7 61.25,141.75 61.25,136 85.24,112.01 90.478,112.01 90.838,112.37 91.61,112.37 J5.40 J4.40
GPIO_22: J4.15 J5.15 | length 11.1
  Top Layer w0.2: J5.15 91.21,84.03 98.75,84.03 J4.15
GPIO_23: J4.16 J5.16 | length 5
  Top Layer w0.2: J5.16 J4.16
GPIO_24: J4.18 J5.18 | length 5
  Top Layer w0.2: J5.18 J4.18
GPIO_25: J4.22 J5.22 | length 5
  Top Layer w0.2: J5.22 J4.22
GPIO_26: J4.37 J5.37 | length 11.1
  Top Layer w0.2: J5.37 91.21,111.97 98.75,111.97 J4.37
GPIO_27: J4.13 J5.13 | length 11.1
  Top Layer w0.2: J5.13 91.21,81.49 98.75,81.49 J4.13
K1: C9.1 J11.7 U5.1 | length 10.5
  Top Layer w0.5: J11.7 32.2,37.756 32.525,37.431 32.525,37.275 34.3,35.5 34.35,35.5 34.5,35.35 C9.1 ; C9.1@34.65,35.3 34.65,30.75 35.495,29.905 36.045,29.905 36.095,29.855 U5.1
K2: C11.1 J11.6 U6.1 | length 21.6
  Top Layer w0.5: J11.6 37.4,39.5 41.35,35.55 41.35,35.5 41.55,35.3 41.6,35.3 41.6,30.965 42.64,29.925 43.045,29.925 43.095,29.875 U6.1
K3: C13.1 J11.5 U7.1 | length 25.5
  Top Layer w0.5: J11.5 33,40.2 43.6,40.2 48.3,35.5 48.35,35.5 48.5,35.35 C13.1 ; C13.1@48.318,35.068 48.5,34.887 48.5,30.8 49.375,29.925 50.045,29.925 50.095,29.875 U7.1
K4: C15.1 J11.4 U8.1 | length 36.7
  Top Layer w0.5: J11.4 32.71,42.5 34.31,40.9 49.9,40.9 55.3,35.5 55.35,35.5 55.5,35.35 C15.1 ; C15.1@55.318,35.068 55.5,34.887 55.5,31.065 56.64,29.925 57.045,29.925 57.095,29.875 U8.1
K5: C17.1 J11.3 U9.1 | length 40.5
  Top Layer w0.5: J11.3 34.6,41.6 56.2,41.6 62.3,35.5 62.35,35.5 62.5,35.35 C17.1 ; C17.1@62.4,34.987 62.4,31.165 63.64,29.925 64.045,29.925 64.095,29.875 U9.1
K6: C19.1 J11.2 U10.1 | length 51.9
  Top Layer w0.5: J11.2 32.8,45.5 36,42.3 62.5,42.3 69.3,35.5 69.35,35.5 69.5,35.35 C19.1 ; C19.1@69.325,35.075 69.5,34.9 69.5,31.065 70.64,29.925 71.045,29.925 71.095,29.875 U10.1
K7: C22.1 J12.7 U11.1 | length 9.4
  Top Layer w0.5: J12.7 32.444,66 33.244,65.2 C22.1 34.5,60.965 35.64,59.825 36.045,59.825 36.095,59.775 U11.1
K8: C24.1 J12.6 U12.1 | length 22.3
  Top Layer w0.5: J12.6 32.8,67.5 34.6,69.3 36.686,69.3 37.486,68.5 38.25,68.5 41.5,65.25 41.5,60.965 42.64,59.825 43.045,59.825 43.095,59.775 U12.1
K9: C26.1 J12.5 U13.1 | length 25.5
  Top Layer w0.5: J12.5 32.251,69 33.251,70 36.976,70 37.576,69.4 37.676,69.3 44.45,69.3 48.5,65.25 C26.1 48.5,60.965 49.64,59.825 50.045,59.825 50.095,59.775 U13.1
K10: C28.1 J12.4 U14.1 | length 36.5
  Top Layer w0.5: J12.4 28.744,70.5 29.144,70.1 31.674,70.1 32.274,70.7 37.266,70.7 37.866,70.1 50.65,70.1 55.5,65.25 C28.1 55.5,60.965 56.64,59.825 57.045,59.825 57.095,59.775 U14.1
K11: C30.1 J12.3 U15.1 | length 39.9
  Top Layer w0.5: J12.3 32.343,72 32.943,71.4 37.556,71.4 38.156,70.8 56.95,70.8 62.5,65.25 C30.1 62.5,60.965 63.64,59.825 64.045,59.825 64.095,59.775 U15.1
K12: C32.1 J12.2 U16.1 | length 51.3
  Top Layer w0.5: J12.2 36.446,73.5 38.423,71.523 63.227,71.523 69.5,65.25 C32.1 69.5,60.965 70.64,59.825 71.045,59.825 71.095,59.775 U16.1
K13: C35.1 J13.7 U17.1 | length 9.6
  Top Layer w0.5: J13.7 33.5,93.2 C35.1 34.5,88.965 35.64,87.825 36.045,87.825 36.095,87.775 U17.1
K14: C37.1 J13.6 U18.1 | length 22
  Top Layer w0.5: J13.6 33.8,96 35,97.2 37.55,97.2 41.5,93.25 C37.1 41.5,88.965 42.64,87.825 43.045,87.825 43.095,87.775 U18.1
K15: C39.1 J13.5 U19.1 | length 24.7
  Top Layer w0.5: J13.5 34.31,97.5 34.71,97.9 43.85,97.9 48.5,93.25 48.5,88.965 49.64,87.825 U19.1@50.045,87.825
K16: C41.1 J13.4 U20.1 | length 35.7
  Top Layer w0.5: J13.4 32.8,99 33.2,98.6 50.15,98.6 55.5,93.25 C41.1 55.5,88.965 56.64,87.825 U20.1@57.045,87.825
K17: C43.1 J13.3 U21.1 | length 39.6
  Top Layer w0.5: J13.3 32.29,100.5 33.49,99.3 56.45,99.3 62.5,93.25 62.5,88.965 63.64,87.825 U21.1@64.045,87.825
K18: C45.1 J13.2 U22.1 | length 50.9
  Top Layer w0.5: J13.2 32.5,102 34.5,100 62.75,100 69.5,93.25 C45.1 69.5,88.965 70.64,87.825 U22.1@71.045,87.825
LED_GND: C8.2 C9.2 C10.2 C11.2 C12.2 C13.2 C14.2 C15.2 C16.2 C17.2 C18.2 C19.2 C20.1 C21.2 C22.2 C23.2 C24.2 C25.2 C26.2 C27.2 C28.2 C29.2 C30.2 C31.2 C32.2 C33.1 C34.2 C35.2 C36.2 C37.2 C38.2 C39.2 C40.2 C41.2 C42.2 C43.2 C44.2 C45.2 C46.1 J14.2 J15.2 J16.2 R26.1 R27.1 R28.1 R29.1 R30.1 R31.1 R33.1 R34.1 R35.1 R36.1 R37.1 R38.1 R40.1 R41.1 R42.1 R43.1 R44.1 R45.1 U5.5 U5.9 U6.5 U6.9 U7.5 U7.9 U8.5 U8.9 U9.5 U9.9 U10.5 U10.9 U11.5 U11.9 U12.5 U12.9 U13.5 U13.9 U14.5 U14.9 U15.5 U15.9 U16.5 U16.9 U17.5 U17.9 U18.5 U18.9 U19.5 U19.9 U20.5 U20.9 U21.5 U21.9 U22.5 U22.9
  other v1: 36.05,31.45 37.35,31.45 38.65,31.45 39.95,31.45 43.05,31.45 44.35,31.45 45.65,31.45 46.95,31.45 50.05,31.45 51.35,31.45 52.65,31.45 53.95,31.45 57.05,31.45 58.35,31.45 59.65,31.45 60.95,31.45 64.05,31.45 65.35,31.45 66.65,31.45 67.95,31.45 71.05,31.45 72.35,31.45 73.65,31.45 74.95,31.45 36.05,32.75 37.35,32.75 38.65,32.75 39.95,32.75 43.05,32.75 44.35,32.75 45.65,32.75 46.95,32.75 50.05,32.75 51.35,32.75 52.65,32.75 53.95,32.75 57.05,32.75 58.35,32.75 59.65,32.75 60.95,32.75 64.05,32.75 65.35,32.75 66.65,32.75 67.95,32.75 71.05,32.75 72.35,32.75 73.65,32.75 74.95,32.75 36.05,61.35 37.35,61.35 38.65,61.35 39.95,61.35 43.05,61.35 44.35,61.35 45.65,61.35 46.95,61.35 50.05,61.35 51.35,61.35 52.65,61.35 53.95,61.35 57.05,61.35 58.35,61.35 59.65,61.35 60.95,61.35 64.05,61.35 65.35,61.35 66.65,61.35 67.95,61.35 71.05,61.35 72.35,61.35 73.65,61.35 74.95,61.35 36.05,62.65 37.35,62.65 38.65,62.65 39.95,62.65 43.05,62.65 44.35,62.65 45.65,62.65 46.95,62.65 50.05,62.65 51.35,62.65 52.65,62.65 53.95,62.65 57.05,62.65 58.35,62.65 59.65,62.65 60.95,62.65 64.05,62.65 65.35,62.65 66.65,62.65 67.95,62.65 71.05,62.65 72.35,62.65 73.65,62.65 74.95,62.65 36.05,89.35 37.35,89.35 38.65,89.35 39.95,89.35 43.05,89.35 44.35,89.35 45.65,89.35 46.95,89.35 50.05,89.35 51.35,89.35 52.65,89.35 53.95,89.35 57.05,89.35 58.35,89.35 59.65,89.35 60.95,89.35 64.05,89.35 65.35,89.35 66.65,89.35 67.95,89.35 71.05,89.35 72.35,89.35 73.65,89.35 74.95,89.35 36.05,90.65 37.35,90.65 38.65,90.65 39.95,90.65 43.05,90.65 44.35,90.65 45.65,90.65 46.95,90.65 50.05,90.65 51.35,90.65 52.65,90.65 53.95,90.65 57.05,90.65 58.35,90.65 59.65,90.65 60.95,90.65 64.05,90.65 65.35,90.65 66.65,90.65 67.95,90.65 71.05,90.65 72.35,90.65 73.65,90.65 74.95,90.65
  other v2: 39.1,26 46.2,26 53.1,26 60.2,26 67.2,26 74.1,26 75.3,34.8 76.7,34.8 39.9,35.7 46.9,35.7 53.9,35.7 60.9,35.7 67.9,35.7 34.5,37.5 41.5,37.5 48.5,37.5 55.5,37.5 62.5,37.5 69.5,37.5 35.6,38.5 42.6,38.5 49.6,38.5 56.6,38.5 63.5,38.5 70.5,38.5 38.2,56 45.2,56 52.2,56 59.2,56 66.2,56 73.2,56 77,64.9 39.9,65.6 46.9,65.6 53.9,65.6 60.9,65.6 67.9,65.6 74.9,65.6 48.5,67.3 34.5,67.4 41.5,67.4 55.5,67.4 62.5,67.4 69.5,67.4 35.5,68.4 42.6,68.4 49.5,68.4 56.5,68.4 63.5,68.4 70.5,68.4 38.2,83.6 45.2,83.6 52.2,83.6 59.2,83.6 66.2,83.6 73.2,83.6 77,93 39.9,93.6 46.9,93.6 53.9,93.6 60.9,93.6 67.9,93.6 74.9,93.6 34.5,95.4 41.5,95.4 48.5,95.4 55.5,95.4 62.5,95.4 69.5,95.4 35.7,96.3 42.7,96.3 49.7,96.3 56.7,96.3 63.7,96.3 70.7,96.3
MISO: J4.21 J5.21 R13.2 U4.12 | length 75.1
  Top Layer w0.2: J5.21 91.21,91.65 98.75,91.65 J4.21
  Top Layer w0.25: U4.12 84.6,137.135 83.965,136.5 R13.2 80.9,136.45 79.9,135.45 79.9,131.6 92.2,119.3 97.6,119.3 101.9,115 101.9,92.3 J4.21
MOSI: J4.19 J5.19 U4.11 | length 71.3
  Top Layer w0.2: J5.19 91.21,89.11 98.75,89.11 J4.19
  Top Layer w0.25: v2(83.4,138.5) 83.448,138.452 85.002,138.452 U4.11
  Bottom Layer w0.2: 95.3,91.5 95.3,90.792 96.982,89.11 98.75,89.11 J4.19
  Bottom Layer w0.25: v2(83.4,138.5) 83.4,128.3 95.3,116.4 95.3,91.5
NetC20_2: C20.2 R32.1 | length 1.9
  Top Layer w0.25: R32.1 C20.2
NetC33_2: C33.2 R39.1 | length 1.7
  Top Layer w0.25: R39.1 C33.2
NetC46_2: C46.2 R46.1 | length 1.9
  Top Layer w0.25: R46.1 C46.2
NetD4_2: D4.2 R7.2 | length 3
  Top Layer w0.2: R7.2 D4.2
NetD5_2: D5.2 R8.2 | length 3.1
  Top Layer w0.2: R8.2 D5.2
NetF1_2: F1.2 J14.1 | length 8.6
  Top Layer w2: J14.1 40.15,52.5 40.35,52.7 F1.2
NetF2_2: F2.2 J15.1 | length 8.5
  Top Layer w2: J15.1 33.553,80.648 41.948,80.648 F2.2
NetF3_2: F3.2 J16.1 | length 8.5
  Top Layer w2: J16.1 F3.2@42,109
NetJ2_4: J2.4 R2.1 | length 5.5
  Top Layer w0.25: J2.4 47.14,162.19 47.7,162.75 R2.1
NetJ3_4: J3.4 R4.1 | length 5.6
  Top Layer w0.25: J3.4 57.74,162.19 58.3,162.75 R4.1
NetJ8_1: J8.1 Q2.3 R20.2 | length 13.8
  Top Layer w0.5: J8.1 44.1,124.5 44.75,123.85 R20.2 45.9,123.8 46.3,124.2 46.3,124.35 46.45,124.5 Q2.3
NetJ9_1: J9.1 Q3.3 R21.2 | length 14
  Top Layer w0.5: J9.1 43.85,134.5 44.75,133.6 R21.2 45.9,133.55 46.3,133.95 46.3,134.1 46.45,134.25 Q3.3
NetJ10_1: J10.1 Q4.3 R22.2 | length 14
  Top Layer w0.5: J10.1 43.85,144.5 44.75,143.6 R22.2 45.9,143.55 46.3,143.95 46.3,144.1 46.45,144.25 Q4.3
NetQ1_G: Q1.G R5.2 R6.1 | length 4.2
  Top Layer w0.25: R5.2 R6.1 79.9,163.45 81.018,164.568 81.44,164.568 81.495,164.623 Q1.G
NetQ2_1: Q2.1 Q5.2 R14.1 | length 3.8
  Top Layer w0.5: Q2.1 50.35,123.5 50.5,123.65 R14.1 50.5,123.75 50.65,123.9 50.7,123.9 51.15,124.35 52,124.35 Q5.2
NetQ3_1: Q3.1 Q6.2 R15.1 | length 3.8
  Top Layer w0.5: Q3.1 50.35,133.25 50.5,133.4 R15.1 50.5,133.5 50.65,133.65 50.7,133.65 51.15,134.1 52,134.1 Q6.2
NetQ4_1: Q4.1 Q7.2 R16.1 | length 3.8
  Top Layer w0.5: Q4.1 50.35,143.25 50.5,143.4 R16.1 50.5,143.5 50.65,143.65 50.7,143.65 51.15,144.1 52,144.1 Q7.2
NetQ5_1: Q5.1 R17.1 R23.2 | length 3.3
  Top Layer w0.5: Q5.1 57.35,123.5 57.5,123.65 R23.2
NetQ6_1: Q6.1 R18.1 R24.2 | length 3.3
  Top Layer w0.5: Q6.1 57.35,133.25 57.5,133.4 R24.2
NetQ7_1: Q7.1 R19.1 R25.2 | length 3.3
  Top Layer w0.5: Q7.1 57.35,143.25 57.5,143.4 R25.2
NetR26_2: R26.2 U5.6 U5.7 U5.8 | length 8.3
  Top Layer w0.5: U5.8 36.097,34.803 36.097,36.898 R26.2 37.4,36.9 ; U5.7 37.365,36.865 37.4,36.9 ; U5.6 38.585,34.85 38.585,36.015 37.7,36.9 37.4,36.9
NetR27_2: R27.2 U6.6 U6.7 U6.8 | length 8.3
  Top Layer w0.5: U6.8 43.098,34.803 43.098,36.898 R27.2 43.2,36.8 44.4,36.8 ; U6.7 44.365,36.765 44.4,36.8 ; U6.6 45.635,36.065 44.9,36.8 44.4,36.8
NetR28_2: R28.2 U7.6 U7.7 U7.8 | length 8.4
  Top Layer w0.5: U7.8 50.097,34.803 50.097,36.898 R28.2 51.4,36.9 ; U7.7 51.365,36.865 51.4,36.9 ; U7.6 52.635,36.165 51.9,36.9 51.4,36.9
NetR29_2: R29.2 U8.6 U8.7 U8.8 | length 8.3
  Top Layer w0.5: U8.8 57.098,34.803 57.098,36.898 R29.2 57.2,36.8 58.4,36.8 ; U8.7 58.365,36.765 58.4,36.8 ; U8.6 59.635,36.065 58.9,36.8 58.4,36.8
NetR30_2: R30.2 U9.6 U9.7 U9.8 | length 8.4
  Top Layer w0.5: U9.8 64.097,34.803 64.097,36.898 R30.2 65.3,36.9 ; U9.7 65.365,36.835 65.3,36.9 ; U9.6 66.635,36.165 65.9,36.9 65.3,36.9
NetR31_2: R31.2 U10.6 U10.7 U10.8 | length 8.3
  Top Layer w0.5: U10.8 71.097,34.803 71.097,36.897 R31.2 71.2,36.8 72.4,36.8 ; U10.7 72.365,36.765 72.4,36.8 ; U10.6 73.635,36.065 72.9,36.8 72.4,36.8
NetR32_2: R32.2 U5.4 U6.4 U7.4 U8.4 U9.4 U10.4 | length 37
  Top Layer w0.25: v2(75.3,29.4) 76.925,29.4 77.2,29.675 R32.2
  Bottom Layer w0.25: v2(40.3,29.4) v2(47.3,29.4) v2(54.3,29.4) v2(61.3,29.4) v2(68.3,29.4) v2(75.3,29.4)
NetR33_2: R33.2 U11.6 U11.7 U11.8 | length 8.4
  Top Layer w0.5: U11.8 36.097,64.702 36.097,66.797 R33.2 37.4,66.8 ; U11.7 37.365,66.765 37.4,66.8 ; U11.6 38.635,65.965 37.8,66.8 37.4,66.8
NetR34_2: R34.2 U12.6 U12.7 U12.8 | length 8.3
  Top Layer w0.5: U12.8 43.098,64.703 43.098,66.797 R34.2 ; R34.2@43.103,66.803 44.402,66.803 44.803,66.803 45.638,65.968 U12.6@45.638,64.702 ; U12.7@44.368,64.702 44.368,66.768
NetR35_2: R35.2 U13.6 U13.7 U13.8 | length 8.3
  Top Layer w0.5: U13.8 50.097,64.702 50.097,66.797 R35.2 ; R35.2@50.103,66.803 51.402,66.803 51.802,66.803 52.637,65.968 U13.6@52.637,64.702 ; U13.7@51.367,64.702 51.367,66.768
NetR36_2: R36.2 U14.6 U14.7 U14.8 | length 8.3
  Top Layer w0.5: U14.8 57.098,64.703 57.098,66.797 R36.2 ; R36.2@57.103,66.803 58.402,66.803 58.803,66.803 59.638,65.968 U14.6@59.638,64.702 ; U14.7@58.368,64.702 58.368,66.768
NetR37_2: R37.2 U15.6 U15.7 U15.8 | length 8.3
  Top Layer w0.5: U15.8 64.097,64.702 64.097,66.797 R37.2 ; R37.2@64.103,66.803 65.402,66.803 65.802,66.803 66.637,65.968 U15.6@66.637,64.702 ; U15.7@65.367,64.702 65.367,66.768
NetR38_2: R38.2 U16.6 U16.7 U16.8 | length 8.3
  Top Layer w0.5: U16.8 71.097,64.702 71.097,66.797 R38.2 ; R38.2@71.103,66.803 72.402,66.803 72.803,66.803 73.638,65.968 U16.6@73.638,64.702 ; U16.7@72.368,64.702 72.368,66.768
NetR39_2: R39.2 U11.4 U12.4 U13.4 U14.4 U15.4 U16.4 | length 36.8
  Top Layer w0.25: v2(75.3,59.3) 76.85,59.3 R39.2
  Bottom Layer w0.25: v2(40.3,59.3) v2(47.3,59.3) v2(54.3,59.3) v2(61.3,59.3) v2(68.3,59.3) v2(75.3,59.3)
NetR40_2: R40.2 U17.6 U17.7 U17.8 | length 8
  Top Layer w0.5: U17.8 36.095,93.175 36.25,93.33 R40.2 37.25,94.7 ; U17.7 37.365,94.585 37.25,94.7 ; U17.6 38.585,92.75 38.585,93.915 37.8,94.7 37.25,94.7
NetR41_2: R41.2 U18.6 U18.7 U18.8 | length 8
  Top Layer w0.5: U18.8 43.095,93.175 43.25,93.33 R41.2 44.25,94.7 ; U18.7 44.365,94.585 44.25,94.7 ; U18.6 45.585,92.75 45.585,93.915 44.8,94.7 44.25,94.7
NetR42_2: R42.2 U19.6 U19.7 U19.8 | length 8
  Top Layer w0.5: U19.8 50.095,93.175 50.25,93.33 R42.2 51.25,94.7 ; U19.7 51.365,94.585 51.25,94.7 ; U19.6 52.585,92.75 52.585,93.915 51.8,94.7 51.25,94.7
NetR43_2: R43.2 U20.6 U20.7 U20.8 | length 8
  Top Layer w0.5: U20.8 57.095,93.175 57.25,93.33 R43.2 58.25,94.7 ; U20.7 58.365,94.585 58.25,94.7 ; U20.6 59.585,92.75 59.585,93.915 58.8,94.7 58.25,94.7
NetR44_2: R44.2 U21.6 U21.7 U21.8 | length 8
  Top Layer w0.5: U21.8 64.095,93.175 64.25,93.33 R44.2 65.25,94.7 ; U21.7 65.365,94.585 65.25,94.7 ; U21.6 66.585,92.75 66.585,93.915 65.8,94.7 65.25,94.7
NetR45_2: R45.2 U22.6 U22.7 U22.8 | length 8
  Top Layer w0.5: U22.8 71.095,93.175 71.25,93.33 R45.2 72.25,94.7 ; U22.7 72.365,94.585 72.25,94.7 ; U22.6 73.585,92.75 73.585,93.915 72.8,94.7 72.25,94.7
NetR46_2: R46.2 U17.4 U18.4 U19.4 U20.4 U21.4 U22.4 | length 36.7
  Top Layer w0.25: v2(75.3,87.3) 76.9,87.3 R46.2
  Bottom Layer w0.25: v2(40.3,87.3) v2(47.3,87.3) v2(54.3,87.3) v2(61.3,87.3) v2(68.3,87.3) v2(75.3,87.3)
NetU5_2: U5.2 U6.2 U7.2 U8.2 U9.2 U10.2 | length 35
  Bottom Layer w0.25: v2(37.4,28.5) v2(44.4,28.5) v2(51.4,28.5) v2(58.4,28.5) v2(65.4,28.5) v2(72.4,28.5)
NetU11_2: U11.2 U12.2 U13.2 U14.2 U15.2 U16.2 | length 35
  Bottom Layer w0.25: v2(37.4,58.4) v2(44.4,58.4) v2(51.4,58.4) v2(58.4,58.4) v2(65.4,58.4) v2(72.4,58.4)
NetU17_2: U17.2 U18.2 U19.2 U20.2 U21.2 U22.2 | length 35
  Bottom Layer w0.25: v2(37.4,86.4) v2(44.4,86.4) v2(51.4,86.4) v2(58.4,86.4) v2(65.4,86.4) v2(72.4,86.4)
SCK: J4.23 J5.23 U4.13 | length 77.6
  Top Layer w0.2: J5.23 91.21,94.19 98.75,94.19 J4.23
  Top Layer w0.25: U4.13 85.5,135.865 86.125,136.49 86.125,137.57 85.935,137.76 80.06,137.76 79.2,136.9 79.2,131.1 91.9,118.4 97.2,118.4 101.275,114.325 101.275,97.492 101.25,97.467 101.25,96.033 101.275,96.008 101.275,94.215 J4.23
SS: J4.24 J5.24 U4.10 | length 59.9
  Top Layer w0.2: v2(82.159,138.524) 83.31,139.675 U4.10 ; J5.24 J4.24
  Bottom Layer w0.2: v2(82.159,138.524) 82.975,137.709 82.975,127.625 94.6,116 94.6,95.04 J5.24
pads on no net: J2.3 J3.3 J6. J11. J12. J13. U1.1 U1.12 U2.2 U2.3 U2.5 U2.6 U2.7 U3.4

## Polygon pours and split planes (outlines as drawn)
GND on Top Layer "GND_L01_P002" (solid, pour order 2): 30,25 cw(c30,30) 25,30 25,175 cw(c30,175) 30,180 100,180 cw(c100,175) 105,175 105,30 cw(c100,30) 100,25
LED_GND on Top Layer "LED_GND_L01_P000" (solid, pour order 0): 30,25 cw(c30,30) 25,30 25,120 52.5,120 cw(c52.5,90) 82.5,90 82.5,25
GND on Bottom Layer "GND_L02_P003" (solid, pour order 3): 30,25 cw(c30,30) 25,30 25,175 cw(c30,175) 30,180 100,180 cw(c100,175) 105,175 105,30 cw(c100,30) 100,25
LED_GND on Bottom Layer "LED_GND_L02_P001" (solid, pour order 1): 30,25 cw(c30,30) 25,30 25,120 52.5,120 cw(c52.5,90) 82.5,90 82.5,25

## Other copper
Top Layer:
  region net +12V: 82.6,164.5 82.6,168.3 81.8,169.1 83.6,170.9 88.5,170.9 88.5,169 85.5,166 85.5,164.5

## Silkscreen, mask and mechanical layers (free items; w line width, h text height)
Top Overlay:
  drawing of 73 lines, arcs and shapes, not listed
  text "Status" at 41.8,176.925 h3
  text "Power" at 50.3,176.925 h3
  text "Fan 1" at 39.5,172.525 h3
  text "Fan 2" at 50,172.525 h3
  text "+" at 95.25,165.229 h5 r180
  text "-" at 94.75,161.058 h5 r180
  text "LED Temp Sense IN" at 25.5,156.419 h3
  text "12VDC IN" at 86.4,154.642 h5
  text "10V PWM Dimmer Controls" at 25.75,151.525 h3
  text "Analogue Inputs" at 85.7,150.147 h3
  text "GND" at 101.64,147.667 h2
  text "-" at 35.75,147.347 h5
  text "Ch 3" at 37.75,145.292 h5
  text "A7" at 101.64,145.11 h2
  text "+" at 35.25,143.176 h5
  text "A6" at 101.64,142.587 h2
  text "A5" at 101.64,140.047 h2
  text "A4" at 101.64,137.49 h2
  text "-" at 35.75,137.347 h5
  text "GND" at 95.933,135.04 h2 r90
  text "A3" at 101.64,134.967 h2
  text "Ch 2" at 37.75,134.792 h5
  text "+" at 35.25,133.176 h5
  text "A2" at 101.64,132.41 h2
  text "A1" at 101.64,129.87 h2
  text "-" at 35.75,127.347 h5
  text "A0" at 101.64,127.347 h2
  text "Ch 1" at 37.75,124.792 h5
  text "+" at 35.25,123.176 h5
  text "3V3" at 97.3,122.417 h2
  text "1A LED Power Supplies" at 25.75,116.169 h3
  text "RPi Interface" at 87.7,115.325 h3
  text "40" at 94.1,112.817 h2
  text "-" at 35.75,111.847 h5
  text "Ch 3 PSU IN" at 46,108.792 h5
  text "+" at 35.25,107.676 h5
  text "LED Bank 3 OUT" at 33.5,98.275 h3
  text "-" at 35.75,83.347 h5
  text "Ch 2 PSU IN" at 46,80.542 h5
  text "+" at 35.25,79.426 h5
  text "LED Bank 2 OUT" at 33.5,69.775 h3
  text "Exp" at 89.4,60.019 h3
  text "RPi" at 97.1,60 h3
  text "-" at 35.75,55.097 h5
  text "Ch 1 PSU IN" at 46,52.292 h5
  text "+" at 35.25,51.176 h5
  text "LED Bank 1 OUT" at 33.5,41.775 h3
  text "LED array controller" at 83.5,37.97 h2.5
  text "Feb 20204 - version 0" at 81.9,35.628 h2.5